# Altium PCB PCB4.PcbDoc (part 2 of 3)
Units mm, origin at the board's own origin, x right, y up, seen from the top; angles counter-clockwise.
Board outline 75.87 x 93.52 mm, 2 copper layers (Top Layer, Bottom Layer); 206 components, 153 nets, 707 pads, 254 vias.
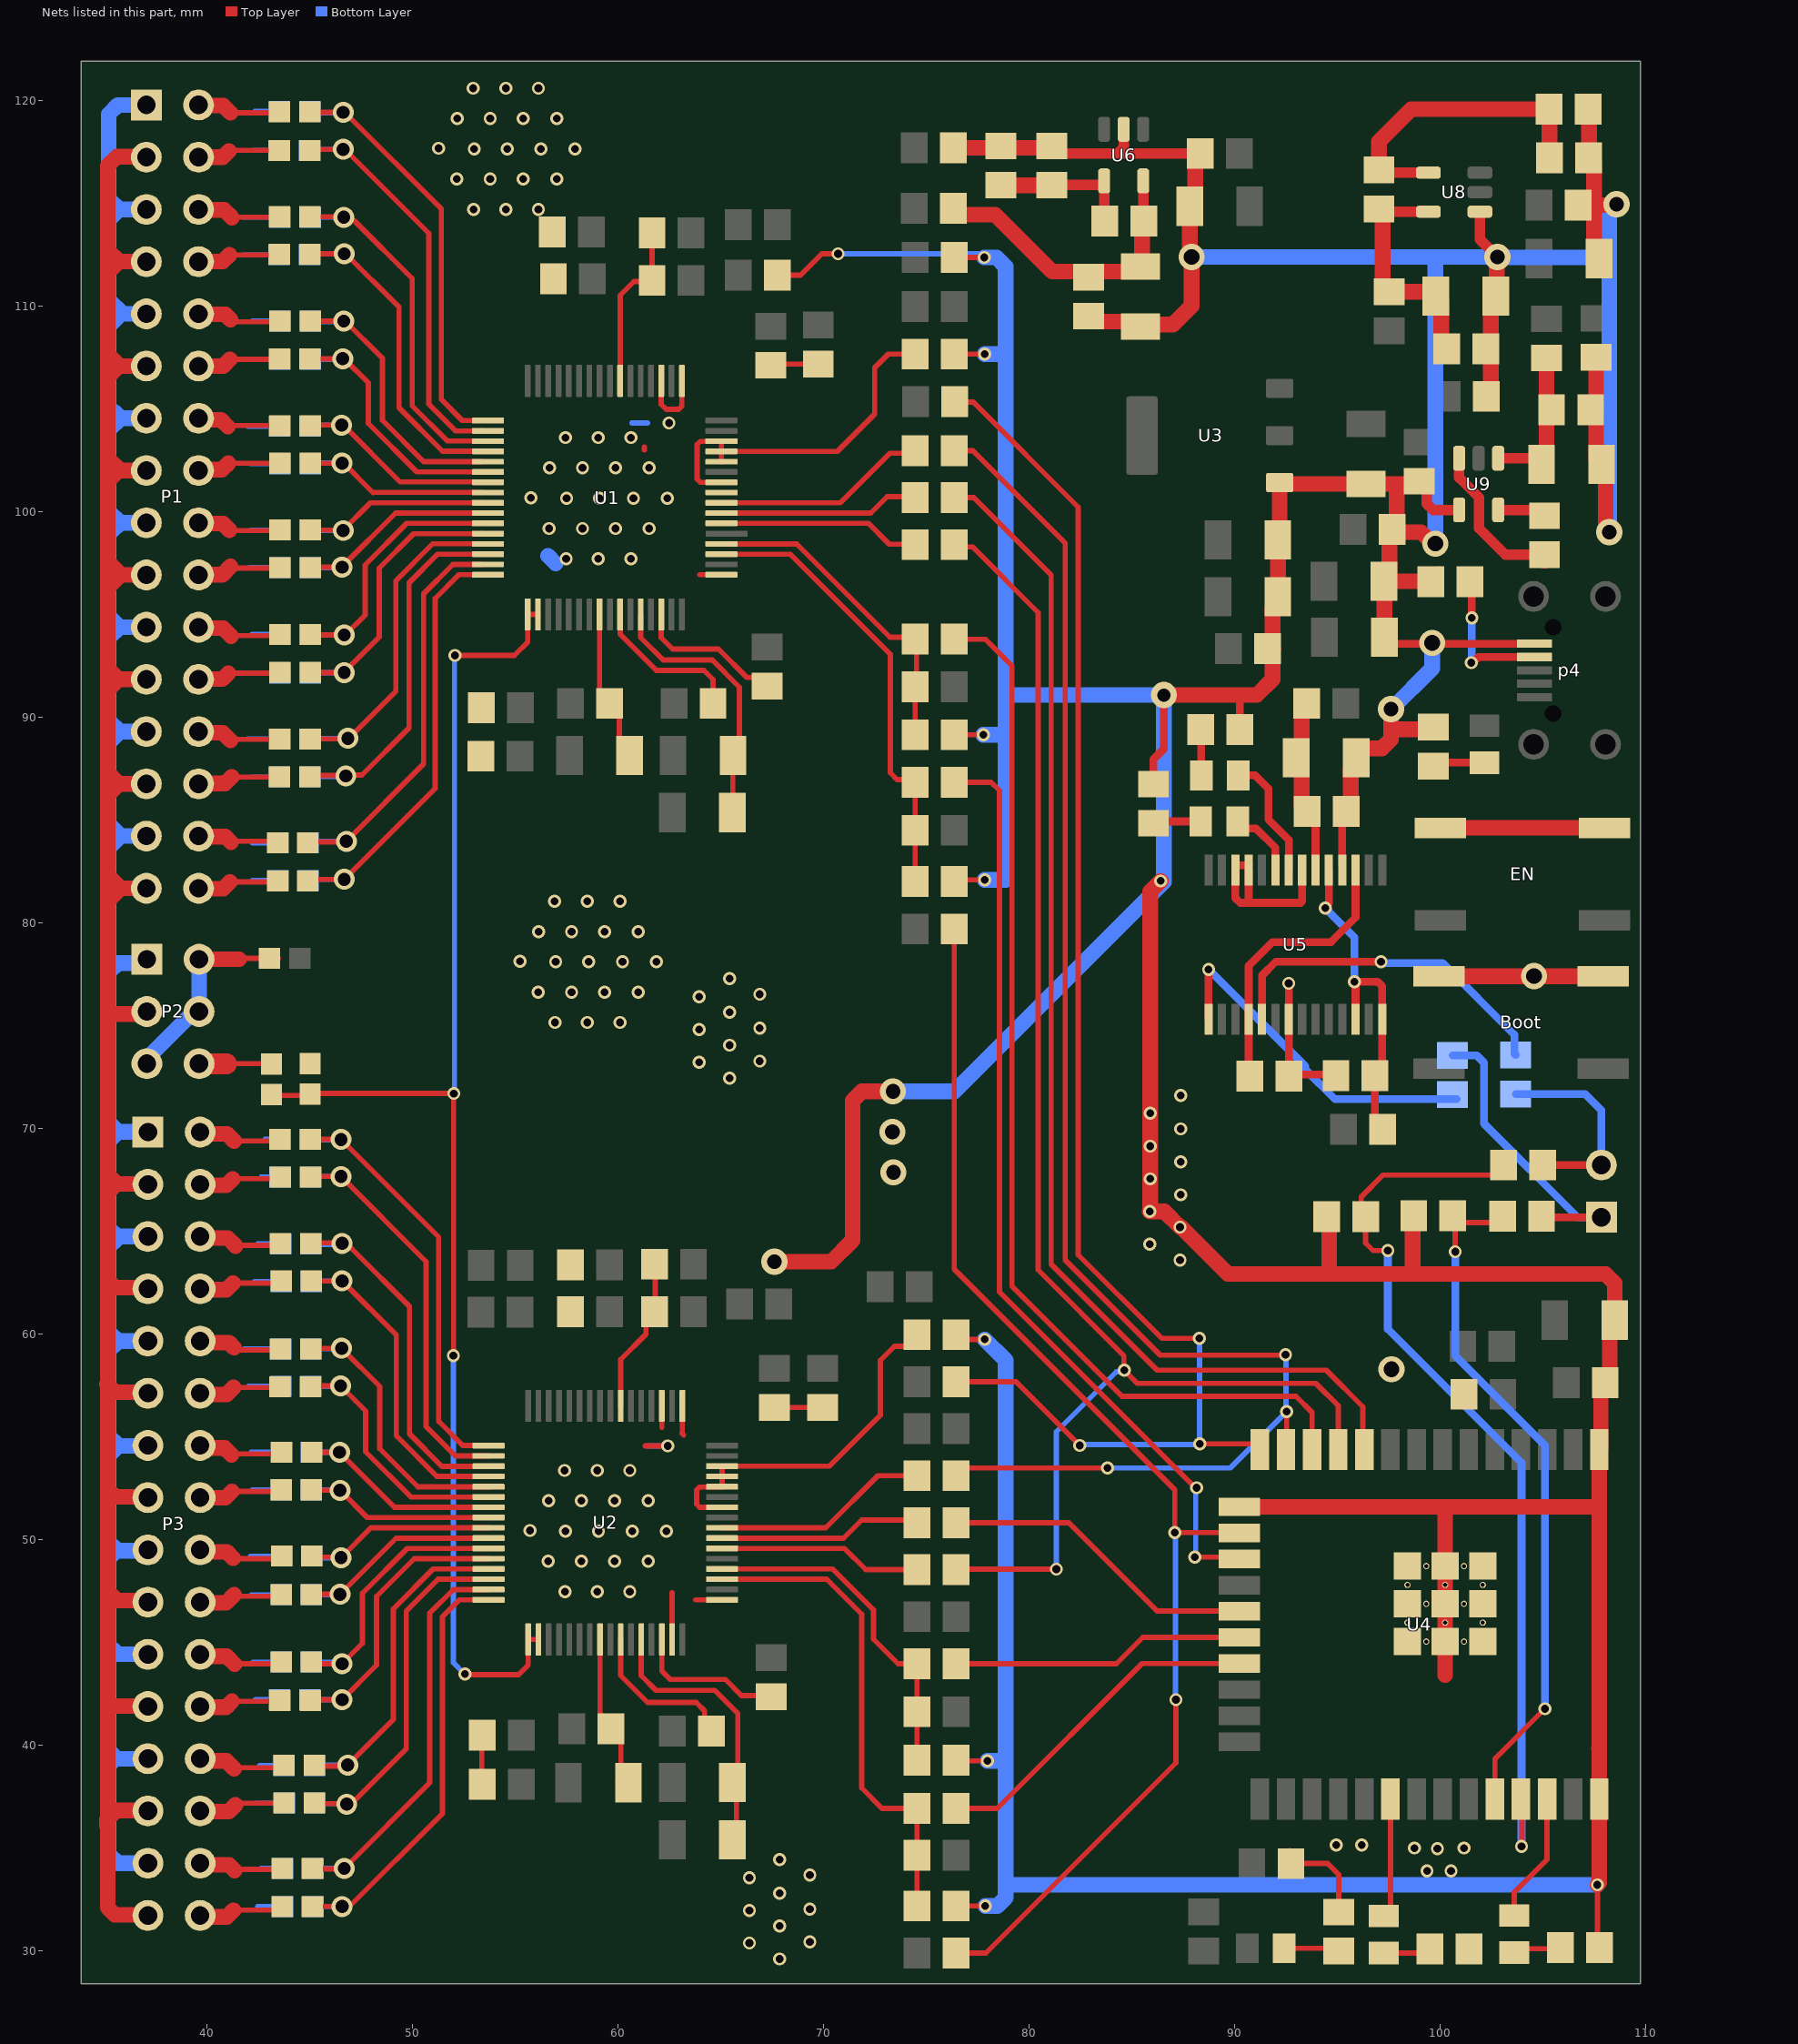
[diagram p2: the nets of this part, all layers, seen from the top]

## Via types
v1: diameter 0.635, hole 0.381, Top Layer to Bottom Layer, 194 vias
v2: diameter 1.016, hole 0.635, Top Layer to Bottom Layer, 33 vias
v3: diameter 1.27, hole 0.711, Top Layer to Bottom Layer, 17 vias
v4: diameter 1.27, hole 0.762, Top Layer to Bottom Layer, 8 vias
v5: diameter 1.27, hole 0.635, Top Layer to Bottom Layer, 2 vias

## Nets (pads, with @x,y where several pads share a name; then routed paths per layer and width w, separated by ;. In a path a pad name is that pad's centre, name@x,y a point inside that pad or via, vN(x,y) a via of type N, cw(c..) or ccw(c..) an arc to the next point about the centre after c; other vN are vias at no path point) (continued)
GND: Boot.1 Boot.3 C1.2 C3.2 C4.2 C5.2 C6.2 C7.2 C8.2 C11.2 C12.2 C26.2 C28.2 C29.2 C30.2 C31.2 C32.2 C33.2 C34.2 C35.2 C36.1 C37.2 C38.2 C39.1 C40.1 C41.2 C42.1 C43.1 C44.2 C45.2 C46.1 C47.1 C48.1 C49.2 C50.2 C51.1 C52.2 C53.2 C54.1 C55.1 C56.2 C57.1 C58.1 C59.2 C60.2 C61.2 C62.1 C63.2 C65.1 C66.2 C67.1 C68.2 C69.2 C70.2 C71.1 C72.1 C73.2 C74.1 C75.1 C76.2 C77.2 C78.1 C79.2 C80.1 C81.2 C82.1 C83.1 C84.2 C85.2 C86.1 C87.2 C88.1 C89.1 C90.2 C91.2 C92.2 C93.1 C94.1 C95.1 C96.2 C97.1 C98.1 C99.1 C100.1 EN.1 EN.3 p4.G R36.1 R48.2 R50.2 R63.2 R66.1 R68.1 R70.2 R71.1 R73.1 R75.2 R76.1 R77.1 R78.1 U1.33 U1.41 U1.49 U1.51 U2.31 U2.33 U2.49 U2.51 U3.1 U4.1 U4.15 U4.38 U4.39_1 U4.39_2 U4.39_3 U4.39_4 U4.39_5 U4.39_6 U4.39_7 U4.39_8 U4.39_9 U4.39_10 U4.39_11 U4.39_12 U4.39_13 U4.39_14 U4.39_15 U4.39_16 U4.39_17 U4.39_18 U4.39_19 U4.39_20 U4.39_21 U5.7 U5.18 U5.21 U5.25 U5.26 U6.2 U8.1 U9.4 | length 539.4
  Top Layer w0.254: C4.2@53.33,90.729 C4.2@53.355,90.703 ; C5.2@53.373,38.711 C6.2@53.373,40.11 ; C6.2@53.373,40.237 53.619,40.484 C6.2@53.619,40.589 ; C6.2@53.398,40.466 C6.2@53.619,40.687 ; 61.29,102.972 61.29,103.124 ; 61.316,54.534 v1(62.433,54.534) ; U1.51@62.11,106.34 62.11,105.2 62.357,104.953 62.958,104.953 63.107,105.102 63.107,106.337 U1.49@63.11,106.34 ; 62.135,55.445 U2.51@62.135,56.48 ; U2.31@62.635,45.12 62.635,47.398 ; 63.119,55.143 63.195,55.067 ; 63.135,55.16 U2.49@63.135,56.48 ; 63.789,47.05 U2.33@65.065,47.05 ; 63.989,96.91 U1.33@65.04,96.91 ; C26.2@66.995,107.544 C26.2@67.437,107.102 67.488,107.152 C29.2@69.748,107.152 ; C28.2@67.538,56.48 C28.2@67.615,56.403 C30.2@69.952,56.403 ; R36.1@67.752,111.481 68.885,111.481 69.926,112.522 v1(70.714,112.522) ; C32.2@76.363,89.129 v1(77.775,89.129) ; R48.2@76.363,107.645 v1(77.851,107.645) ; R50.2@76.363,112.344 v1(77.826,112.344) ; C33.2@76.454,32.156 v1(77.876,32.156) ; C34.2@76.454,39.243 76.479,39.218 v1(77.978,39.218) ; R63.2@76.454,59.944 76.683,59.715 v1(77.851,59.715) ; C31.2@76.759,82.017 76.81,82.067 v1(77.851,82.067) ; C36.1@92.113,95.834 C36.1@92.367,96.088 ; C39.1@92.695,34.849 92.695,34.749 93.218,34.226 94.527,34.226 95.072,33.68 R71.1@95.072,31.862 ; C55.1@100.802,57.404 C55.1@101.158,57.048 ; C55.1@101.358,57.204 C55.1@101.514,57.048 ; R73.1@101.407,30.059 R73.1@101.422,30.074 ; v1(107.655,33.188) 107.655,30.24 R76.1@107.76,30.135
  Top Layer w0.381: R68.1@86.055,86.726 86.055,87.935 86.563,88.443 v5(86.563,91.059) ; U5.26@90.039,82.543 90.039,81.182 90.272,80.95 90.678,80.95 ; U5.26@90.04,82.779 U5.25@90.69,82.779 ; R78.1@90.256,89.383 90.256,90.79 90.526,91.059 ; U5.25@90.689,82.543 90.689,80.961 90.678,80.95 ; v1(92.634,77.038) 92.639,77.033 U5.7@92.639,75.293 92.639,72.614 92.619,72.593 94.884,72.593 C43.1@94.935,72.542 ; U5.21@93.289,82.543 93.289,81.021 93.218,80.95 90.678,80.95 ; U5.18@95.24,82.779 95.24,85.196 C97.1@95.438,85.395 ; C54.1@97.294,93.878 97.613,93.56 p4.G@104.602,93.56 ; R77.1@99.187,96.799 99.416,97.028 99.879,97.028 R77.1@99.981,97.13
  Top Layer w0.508: C38.2@81.102,117.765 81.468,117.399 84.316,117.399 ; U6.2@84.607,118.578 84.613,118.572 84.613,117.696 84.316,117.399 ; C49.2@88.255,117.399 84.316,117.399 ; C50.2@98.984,101.463 99.351,101.095 99.351,100.369 99.655,100.066 U9.4@100.929,100.066 ; U8.1@101.982,114.528 U8.1@101.941,114.569 101.941,113.223 v3(102.794,112.37)
  Top Layer w0.737: 107.747,39.192 107.747,39.776 107.747,51.41 U4.1@107.747,54.356 107.829,54.438 107.829,57.223 108.113,57.507 C62.1@108.113,57.607
  Top Layer w0.762: v3(67.615,63.5) 70.383,63.5 71.425,64.541 71.425,71.334 71.871,71.78 v3(73.381,71.78) ; C37.2@76.312,117.678 81.016,117.678 C38.2@81.102,117.765 ; C41.2@82.906,109.489 83.173,109.222 85.177,109.222 C40.1@85.42,108.979 85.523,109.082 87.01,109.082 87.909,109.982 v4(87.909,112.37) ; v1(85.877,65.938) 86.589,65.938 v1(87.351,65.176) ; v1@85.903,65.964 v1(85.903,67.526) v1(85.903,69.113) ; v1@85.903,69.164 85.903,81.509 v1(86.411,82.017) ; v5(86.563,91.059) 90.526,91.059 91.084,91.059 91.846,91.821 C35.2@91.846,93.319 ; v1@87.376,65.202 89.68,62.898 94.666,62.898 ; C48.1@87.745,114.833 88.085,115.174 88.085,115.852 88.087,115.854 88.087,117.231 C49.2@88.255,117.399 ; v4@87.821,112.458 C48.1@87.821,114.833 ; U4.15@90.237,51.571 100.279,51.571 ; C35.2@91.603,93.32 C35.2@91.846,93.563 ; C35.2@91.872,93.294 C35.2@91.846,93.319 ; C42.1@92.05,98.666 C42.1@92.113,98.603 ; C100.1@94.605,65.38 94.605,62.959 94.666,62.898 ; C97.1@95.489,85.395 95.656,85.562 95.656,87.435 95.923,87.701 C44.2@95.923,88.011 95.923,88.196 96.187,88.46 97.166,88.46 97.612,88.907 97.612,89.391 ; C47.1@96.393,101.334 92.253,101.334 U3.1@92.194,101.393 92.194,98.684 C42.1@92.113,98.603 ; C47.1@96.703,101.334 97.892,101.334 ; C46.1@97.269,96.596 97.533,96.86 97.533,98.813 C45.2@97.587,98.867 ; C54.1@97.294,93.878 C54.1@97.294,94.188 ; C54.1@97.558,94.452 C54.1@97.294,94.188 ; v3(97.612,90.373) 97.612,89.391 ; C99.1@98.669,65.303 98.669,62.961 98.732,62.898 ; C50.2@98.984,101.463 98.855,101.334 97.892,101.334 ; R77.1@99.558,96.571 99.532,96.596 97.294,96.596 C54.1@97.294,94.188 ; R66.1@99.67,89.494 99.566,89.391 97.612,89.391 ; v4(99.771,98.425) 99.634,98.425 99.075,98.984 97.8,98.984 C45.2@97.673,99.111 97.892,99.329 97.892,101.334 ; Boot.1@99.944,77.383 Boot.3@107.929,77.383 108.219,77.383 Boot.3@108.229,77.394 ; EN.1@100.021,84.597 EN.3@108.005,84.597 ; 100.247,43.39 U4.39_6@100.247,45.021 U4.39_16@100.247,45.938 U4.39_5@100.247,46.856 U4.39_15@100.247,47.773 U4.39_4@100.247,48.691 100.247,51.539 100.279,51.571 ; C53.2@102.255,105.588 102.474,105.806 102.474,110.224 C51.1@102.715,110.465 C51.1@102.754,110.504 ; v3(102.794,112.37) 102.754,112.33 C51.1@102.754,110.504 ; C51.1@102.918,110.668 C51.1@102.754,110.504 ; C56.2@106.716,114.884 C56.2@107.249,114.884 ; C59.2@107.198,119.558 107.249,119.507 R75.2@107.249,117.196 ; R75.2@107.224,117.196 107.493,116.927 107.493,116.38 107.493,114.884 ; C63.2@107.635,107.442 C63.2@107.594,107.483 107.594,105.743 107.594,105.196 C60.2@107.325,104.927 107.594,104.658 107.594,104.112 107.594,103.53 107.597,103.528 107.597,102.55 C58.1@107.861,102.286 108.052,102.095 108.052,99.299 108.229,99.121 v3(108.229,98.984) ; v1(107.655,33.188) 107.747,33.279 U4.38@107.747,37.356 107.747,39.192 ; 107.721,39.802 107.747,39.776 ; 107.747,51.41 107.585,51.571 100.279,51.571 ; C57.1@107.81,112.293 107.493,112.61 107.493,114.54 107.249,114.784 C56.2@107.249,114.884 ; R76.1@107.938,30.059 R76.1@107.938,30.339 ; C62.1@108.036,57.607 108.255,57.826 108.255,59.673 ; C61.2@108.496,60.655 108.496,62.451 108.049,62.898 98.732,62.898 ; v3(108.585,114.935) 108.534,114.884 107.493,114.884 ; C61.2@108.648,60.066 C61.2@108.648,60.249 ; C35.2@91.846,93.319 C35.2@91.846,93.563 ; C35.2@91.846,93.563 91.846,95.258 92.113,95.524 C36.1@92.113,95.834 C42.1@92.113,98.603 ; 94.666,62.898 98.732,62.898 ; C56.2@107.249,114.884 107.493,114.884
  Bottom Layer w0.254: 41.783,112.471 C93.1@43.512,112.471 ; 41.783,114.3 C85.2@43.563,114.3 ; 41.834,59.258 C76.2@43.588,59.258 ; 41.986,88.925 C90.2@43.537,88.925 ; 42.012,104.14 C91.2@43.537,104.14 ; 42.037,57.429 C75.1@43.588,57.429 ; 42.088,97.257 C80.1@43.563,97.257 ; 42.113,49.174 C69.2@43.639,49.174 ; 42.139,99.085 C81.2@43.563,99.085 ; 42.139,102.311 C82.1@43.563,102.311 ; 42.164,47.295 C71.1@43.613,47.295 ; 42.164,54.229 C73.2@43.613,54.229 ; 42.189,94.005 C79.2@43.563,94.005 ; 42.215,52.4 C72.1@43.613,52.4 C72.1@43.461,52.553 ; 42.215,82.042 C95.1@43.461,82.042 ; 42.215,83.871 C96.2@43.461,83.871 ; 42.215,87.071 C89.1@43.537,87.071 ; 42.215,109.245 C84.2@43.563,109.245 ; 42.24,44.018 C70.2@43.615,44.018 ; 42.291,107.391 C83.1@43.563,107.391 ; 42.291,117.551 C94.1@43.512,117.551 ; 42.316,62.535 C74.1@43.612,62.535 ; 42.342,119.456 C92.2@43.537,119.456 C92.2@43.436,119.355 ; 42.367,42.189 C88.1@43.537,42.189 ; 42.418,37.16 C65.1@43.766,37.16 ; 42.418,92.126 C78.1@43.563,92.126 ; 42.469,32.131 C67.1@43.69,32.131 ; 42.469,64.364 C77.2@43.588,64.364 ; 42.57,38.989 C66.2@43.763,38.989 ; 42.647,33.985 C68.2@43.69,33.985 ; 42.647,67.615 C86.1@43.561,67.615 ; 42.824,69.444 C87.2@43.561,69.444 ; 60.681,104.292 61.443,104.292 ; 61.417,54.534 v1(62.433,54.534) ; v1(70.714,112.522) 77.545,112.522 77.672,112.395 v1@77.775,112.395
  Bottom Layer w0.762: 56.595,97.837 56.972,97.46 ; v3(73.381,71.78) 76.378,71.78 86.563,81.966 v5(86.563,91.059) 78.867,91.059 ; v1(77.775,89.129) 78.689,89.129 78.867,88.951 ; v1(77.826,112.344) 78.421,112.344 78.867,111.898 78.867,107.544 ; v1(77.851,59.715) 78.867,58.699 78.867,39.218 ; v1(77.851,82.067) 78.867,82.067 78.867,88.951 ; v1(77.851,107.645) 78.765,107.645 78.867,107.544 ; v1(77.876,32.156) 78.461,32.156 78.867,32.563 78.867,33.188 ; v1(77.978,39.218) 78.867,39.218 ; v4(87.909,112.37) 99.771,112.37 ; v3(97.612,90.373) 97.633,90.373 99.619,92.359 v4(99.619,93.599) ; v4(99.771,98.425) 99.771,112.37 ; v1(107.655,33.188) 78.867,33.188 ; v3@108.092,98.984 v3(108.229,98.984) 108.229,112.203 ; v3(108.585,114.935) 108.585,114.798 108.229,114.442 108.229,112.203 ; 78.867,33.188 78.867,39.218 ; 78.867,88.951 78.867,91.059 ; 78.867,91.059 78.867,107.544 ; 99.771,112.37 v3(102.794,112.37) 102.819,112.344 108.088,112.344 108.229,112.203
  other v1: 67.869,29.578 66.396,30.353 69.342,30.404 67.869,31.178 66.396,31.941 69.342,32.004 67.869,32.785 66.396,33.528 69.342,33.655 99.365,33.858 100.533,33.858 67.869,34.417 99.873,34.95 98.755,34.976 101.168,34.976 94.945,35.128 96.19,35.128 57.429,47.447 58.991,47.447 60.579,47.447 56.604,48.92 58.229,48.92 59.836,48.92 61.468,48.92 57.455,50.394 59.055,50.394 60.706,50.394 62.357,50.394 55.715,50.419 56.629,51.867 58.229,51.867 59.836,51.867 61.468,51.867 57.404,53.34 58.991,53.34 60.579,53.34 87.351,63.576 85.877,64.351 87.376,66.751 87.376,68.351 87.376,69.958 85.903,70.714 87.376,71.59 65.43,72.428 63.957,73.203 66.904,73.254 65.43,74.028 63.957,74.79 66.904,74.854 56.947,75.133 58.509,75.133 60.096,75.133 65.43,75.635 63.957,76.378 66.904,76.505 56.121,76.606 57.747,76.606 59.353,76.606 60.985,76.606 65.43,77.267 56.972,78.08 58.572,78.08 60.223,78.08 61.874,78.08 55.232,78.105 56.147,79.553 57.747,79.553 59.353,79.553 60.985,79.553 56.921,81.026 58.509,81.026 60.096,81.026 57.48,97.688 59.042,97.688 60.63,97.688 56.655,99.162 58.28,99.162 59.887,99.162 61.519,99.162 57.506,100.635 59.106,100.635 60.757,100.635 62.408,100.635 55.766,100.66 56.68,102.108 58.28,102.108 59.887,102.108 61.519,102.108 57.455,103.581 59.042,103.581 60.63,103.581 62.484,104.292 52.984,114.681 54.546,114.681 56.134,114.681 52.159,116.154 53.785,116.154 55.391,116.154 57.023,116.154 53.01,117.627 54.61,117.627 56.261,117.627 57.912,117.627 51.27,117.653 52.184,119.101 53.785,119.101 55.391,119.101 57.023,119.101 52.959,120.574 54.546,120.574 56.134,120.574
  other v3: 73.406,67.843 73.355,69.812
  other v4: 97.638,58.268 104.572,77.394
GPIO: R63.1 U2.42 U2.44 U2.45 U2.46 | length 18.7
  Top Layer w0.254: U2.44@65.052,52.537 63.979,52.537 63.83,52.388 63.83,51.699 63.979,51.55 U2.42@65.065,51.55 ; U2.44@65.065,52.55 U2.45@65.065,53.05 U2.46@65.065,53.55 70.289,53.55 72.771,56.032 72.771,58.699 73.455,59.383 74.031,59.383 74.554,59.906 R63.1@74.554,59.944 ; R63.1@74.5,59.422 R63.1@75.021,59.944
GPIO0: R48.1 U1.42 U1.44 U1.45 U1.46 | length 17.9
  Top Layer w0.254: U1.42@65.04,101.41 64.004,101.41 63.856,101.559 63.856,103.248 64.004,103.397 65.027,103.397 U1.46@65.04,103.41 U1.45@65.04,102.91 ; U1.44@65.04,102.41 U1.45@65.04,102.91 ; R48.1@74.463,107.645 73.152,107.645 72.492,106.985 72.492,104.724 70.678,102.91 U1.45@65.04,102.91
IN1N: C68.1 R32.1 U2.15 | length 20.6
  Top Layer w0.254: R32.1@45.134,33.909 R32.1@45.16,33.934 ; R32.1@45.134,33.96 46.658,33.96 50.849,38.151 50.849,46.404 51.995,47.55 U2.15@53.705,47.55
  Bottom Layer w0.254: C68.1@45.16,33.985 v2(46.684,33.985)
IN1N_: C96.1 R4.1 U1.15 | length 20.1
  Top Layer w0.254: R4.1@45.237,83.922 46.761,83.922 50.546,87.706 50.546,95.987 51.97,97.41 53.359,97.41 U1.15@53.365,97.417
  Bottom Layer w0.254: C96.1@45.263,83.947 v2(46.787,83.947)
IN1P: C67.2 R31.1 U2.16 | length 21.8
  Top Layer w0.254: R31.1@45.134,32.08 45.185,32.131 v2@46.788,32.131 ; v2@46.863,32.056 51.459,36.652 51.459,46.226 52.282,47.05 U2.16@53.705,47.05
  Bottom Layer w0.254: C67.2@45.16,32.131 v2(46.582,32.131)
IN1P_: C95.2 R3.1 U1.16 | length 21.1
  Top Layer w0.254: R3.1@45.288,82.093 v2(46.685,82.093) 51.105,86.512 51.105,95.758 52.257,96.91 53.359,96.91 U1.16@53.365,96.917
  Bottom Layer w0.254: C95.2@45.263,82.093 v2(46.685,82.093)
IN2N: C66.1 R34.1 U2.13 | length 17.5
  Top Layer w0.254: R34.1@45.109,38.964 46.734,38.964 v2@46.76,38.989 ; v2@46.43,39.065 v2@46.618,39.254 ; v2(46.858,39.014) 49.071,41.227 49.071,46.607 51.014,48.55 U2.13@53.705,48.55
  Bottom Layer w0.254: C66.1@45.233,38.989 45.258,39.014 v2(46.858,39.014)
IN2N_: C90.1 R14.1 U1.13 | length 16.7
  Top Layer w0.254: R14.1@45.212,88.925 46.838,88.925 v2@46.882,88.97 ; v2@46.985,89.027 49.198,91.24 49.198,96.62 51.001,98.423 53.359,98.423 U1.13@53.365,98.417
  Bottom Layer w0.254: C90.1@45.263,88.951 v2(46.863,88.951)
IN2P: C65.2 R33.1 U2.14 | length 18.5
  Top Layer w0.254: R33.1@45.256,37.135 46.782,37.135 v2(46.807,37.109) 47.014,37.109 47.284,37.38 47.286,37.38 49.708,39.802 49.708,46.507 51.257,48.057 53.698,48.057 U2.14@53.705,48.05
  Bottom Layer w0.254: C65.2@45.134,37.135 46.658,37.135 v2@46.684,37.109
IN2P_: C89.2 R10.1 U1.14 | length 18.6
  Top Layer w0.254: R10.1@45.212,87.147 v2@46.738,87.147 ; v2(46.763,87.122) v2@46.788,87.147 ; v2@46.787,87.071 v2@46.863,87.147 ; v2@46.787,87.147 v2@46.788,87.147 ; v2@46.877,87.161 v2@46.863,87.147 ; v2@46.915,87.122 46.89,87.147 v2@46.863,87.147 ; U1.14@53.365,97.917 53.359,97.91 51.225,97.91 49.835,96.52 49.835,89.459 47.549,87.173 46.814,87.173 v2@46.788,87.147 ; v2@46.788,87.147 v2@46.863,87.147
  Bottom Layer w0.254: C89.2@45.237,87.097 46.761,87.097 v2@46.787,87.071
IN3N: C70.1 R25.1 U2.11 | length 13.9
  Top Layer w0.254: R25.1@45.082,43.967 45.056,43.942 v2(46.58,43.942) 47.574,44.936 47.574,47.371 49.753,49.55 U2.11@53.705,49.55
  Bottom Layer w0.254: C70.1@45.085,44.018 v2@46.582,44.018
IN3N_: C79.1 R16.1 U1.11 | length 13.4
  Top Layer w0.254: R16.1@45.161,93.98 v2(46.685,93.98) ; v2@46.707,93.955 47.701,94.948 47.701,97.384 49.728,99.41 53.359,99.41 U1.11@53.365,99.417
  Bottom Layer w0.254: C79.1@45.188,93.98 v2(46.685,93.98)
IN3P: C88.2 R11.1 U2.12 | length 15.1
  Top Layer w0.254: R11.1@45.033,42.189 v2(46.582,42.189) 48.26,43.867 48.26,47.219 50.089,49.047 53.703,49.047 U2.12@53.705,49.05
  Bottom Layer w0.254: C88.2@45.007,42.189 v2(46.582,42.189)
IN3P_: C78.2 R15.1 U1.12 | length 14.5
  Top Layer w0.254: R15.1@45.136,92.151 v2(46.685,92.151) ; v2@46.709,92.202 48.387,93.88 48.387,97.231 50.063,98.908 53.356,98.908 U1.12@53.365,98.917
  Bottom Layer w0.254: C78.2@45.11,92.151 v2(46.685,92.151)
IN4N: C69.1 R29.1 U2.9 | length 10.7
  Top Layer w0.254: R29.1@45.107,49.124 46.506,49.124 v2(46.531,49.098) 47.983,50.55 U2.9@53.705,50.55
  Bottom Layer w0.254: C69.1@45.109,49.174 45.185,49.098 v2(46.531,49.098)
IN4N_: C81.1 R18.1 U1.9 | length 10
  Top Layer w0.254: R18.1@45.21,99.085 46.609,99.085 v2(46.634,99.06) ; v2@46.658,99.111 47.958,100.41 53.359,100.41 U1.9@53.365,100.417
  Bottom Layer w0.254: C81.1@45.288,99.06 v2(46.634,99.06)
IN4P: C71.2 R27.1 U2.10 | length 11
  Top Layer w0.254: R27.1@45.109,47.295 45.134,47.32 v2@46.303,47.32 ; v2(46.48,47.32) 49.21,50.05 U2.10@53.705,50.05
  Bottom Layer w0.254: C71.2@45.083,47.295 46.455,47.295 v2(46.48,47.32)
IN4P_: C80.2 R17.1 U1.10 | length 10.6
  Top Layer w0.254: R17.1@45.237,97.282 v2@46.607,97.282 ; v2@46.607,97.333 49.185,99.91 53.359,99.91 U1.10@53.365,99.917
  Bottom Layer w0.254: C80.2@45.187,97.257 46.558,97.257 v2(46.584,97.282)
IN5N: C73.1 R30.1 U2.7 | length 11.1
  Top Layer w0.254: R30.1@45.083,54.229 v2(46.455,54.229) 49.134,51.55 U2.7@53.705,51.55
  Bottom Layer w0.254: C73.1@45.083,54.229 v2(46.455,54.229)
IN5N_: C91.1 R20.1 U1.7 | length 10.7
  Top Layer w0.254: R20.1@45.187,104.191 v2(46.558,104.191) ; v2@46.582,104.242 49.401,101.422 53.36,101.422 U1.7@53.365,101.417
  Bottom Layer w0.254: C91.1@45.187,104.191 v2(46.558,104.191)
IN5P: C72.2 R28.1 U2.8 | length 10.6
  Top Layer w0.254: R28.1@45.082,52.4 45.109,52.375 v2(46.48,52.375) 47.801,51.054 53.701,51.054 U2.8@53.705,51.05
  Bottom Layer w0.254: C72.2@45.083,52.4 46.455,52.4 v2(46.48,52.375)
IN5P_: C82.2 R19.1 U1.8 | length 10.2
  Top Layer w0.254: R19.1@45.212,102.337 v2(46.584,102.337) ; v2@46.607,102.387 48.085,100.91 48.091,100.917 U1.8@53.365,100.917
  Bottom Layer w0.254: C82.2@45.187,102.362 46.558,102.362 v2(46.584,102.337)
IN6N: C76.1 R22.1 U2.5 | length 14.7
  Top Layer w0.254: R22.1@45.056,59.284 v2(46.557,59.284) 48.412,57.428 48.412,54.407 50.269,52.55 U2.5@53.705,52.55
  Bottom Layer w0.254: C76.1@45.058,59.258 46.531,59.258 v2(46.557,59.284)
IN6N_: C84.1 R21.1 U1.5 | length 14.3
  Top Layer w0.254: R21.1@45.16,109.245 v2(46.66,109.245) ; v2@46.684,109.296 48.539,107.44 48.539,104.419 50.549,102.41 53.359,102.41 U1.5@53.365,102.417
  Bottom Layer w0.254: C84.1@45.161,109.22 46.634,109.22 v2(46.66,109.245)
IN6P: C75.2 R12.1 U2.6 | length 13.5
  Top Layer w0.254: R12.1@45.056,57.455 v2(46.506,57.455) 47.727,56.234 47.727,54.254 49.936,52.045 53.7,52.045 U2.6@53.705,52.05
  Bottom Layer w0.254: C75.2@45.058,57.429 46.48,57.429 v2(46.506,57.455)
IN6P_: C83.2 R5.1 U1.6 | length 13.1
  Top Layer w0.254: R5.1@45.16,107.417 v2(46.609,107.417) ; v2@46.633,107.467 47.854,106.247 47.854,104.267 50.21,101.91 50.217,101.917 U1.6@53.365,101.917
  Bottom Layer w0.254: C83.2@45.161,107.391 46.584,107.391 v2(46.609,107.417)
IN7N: C77.1 R23.1 U2.3 | length 18.3
  Top Layer w0.254: R23.1@45.083,64.414 46.763,64.414 47.06,64.117 49.86,61.317 49.86,55.118 51.435,53.543 53.698,53.543 U2.3@53.705,53.55
  Bottom Layer w0.254: C77.1@45.058,64.364 45.083,64.338 v2@46.557,64.338
  other v2: 46.582,64.389
IN7N_: C85.1 R7.1 U1.3 | length 17.3
  Top Layer w0.254: R7.1@45.161,114.325 46.634,114.325 v2(46.66,114.3) v2@46.704,114.256 ; 47.187,114.13 49.987,111.33 49.987,105.131 51.701,103.416 U1.3@53.365,103.416
  Bottom Layer w0.254: C85.1@45.187,114.3 v2(46.66,114.3)
IN7P: C74.2 R26.1 U2.4 | length 17
  Top Layer w0.254: R26.1@45.056,62.535 45.082,62.56 v2(46.582,62.56) 49.224,59.919 49.224,55.018 51.192,53.05 U2.4@53.705,53.05
  Bottom Layer w0.254: C74.2@45.082,62.535 45.107,62.56 v2(46.582,62.56)
IN7P_: C93.2 R6.1 U1.4 | length 16.5
  Top Layer w0.254: R6.1@45.185,112.522 v2(46.685,112.522) ; v2@46.709,112.573 49.351,109.931 49.351,105.031 51.464,102.917 U1.4@53.365,102.917
  Bottom Layer w0.254: C93.2@45.21,112.522 v2(46.685,112.522)
IN8N: C87.1 R13.1 U2.1 | length 21.6
  Top Layer w0.254: R13.1@45.058,69.444 v2(46.531,69.444) 51.281,64.694 51.281,55.729 52.451,54.559 53.696,54.559 U2.1@53.705,54.55
  Bottom Layer w0.254: C87.1@45.058,69.418 46.506,69.418 v2(46.531,69.444)
IN8N_: C92.1 R9.1 U1.1 | length 21.5
  Top Layer w0.254: R9.1@45.161,119.405 v2@46.841,119.405 ; v2@46.658,119.456 46.775,119.34 51.408,114.706 51.408,105.437 52.428,104.417 U1.1@53.365,104.417
  Bottom Layer w0.254: C92.1@45.161,119.38 46.609,119.38 v2(46.634,119.405)
IN8P: C86.2 R24.1 U2.2 | length 20.5
  Top Layer w0.254: R24.1@45.056,67.615 45.083,67.64 v2(46.531,67.64) 50.671,63.5 50.671,55.475 52.095,54.051 53.704,54.051 U2.2@53.705,54.05
  Bottom Layer w0.254: C86.2@45.083,67.589 45.134,67.64 v2(46.531,67.64)
IN8P_: C94.2 R8.1 U1.2 | length 20.1
  Top Layer w0.254: R8.1@45.187,117.602 v2(46.634,117.602) v2@46.638,117.606 ; v2@46.658,117.653 50.798,113.513 50.798,105.208 52.097,103.91 53.359,103.91 U1.2@53.365,103.917
  Bottom Layer w0.254: C94.2@45.237,117.602 v2(46.634,117.602)
LED2: D3.A U4.36 | length 6.3
  Top Layer w0.254: D3.A@103.61,31.696 103.61,32.82 105.207,34.417 U4.36@105.207,37.356
LED3: D2.A U4.30 | length 5.8
  Top Layer w0.254: D2.A@97.257,31.67 97.587,32.001 U4.30@97.587,37.356
MISO: R51.2 R62.2 U4.14 | length 72.9
  Top Layer w0.254: R62.2@76.454,57.658 79.375,57.658 v1(82.474,54.559) ; R51.2@76.998,105.308 77.292,105.308 82.398,100.203 82.398,63.83 86.462,59.766 v1(88.29,59.766) ; v1(88.316,54.635) 90.914,54.635 91.059,54.49 U4.14@91.059,54.178
  Bottom Layer w0.254: v1(82.474,54.559) 82.512,54.597 88.278,54.597 v1(88.316,54.635) 88.303,54.648 88.303,59.753 v1(88.29,59.766)
MOSI: R40.2 R52.2 U4.16 | length 62.7
  Top Layer w0.254: R40.2@76.363,79.68 76.363,63.134 87.097,52.4 v1(87.097,50.317) 90.22,50.317 U4.16@90.237,50.301 ; R52.2@76.454,29.87 77.902,29.87 87.147,39.116 v1(87.147,42.189)
  Bottom Layer w0.254: v1(87.097,50.317) 87.122,50.292 87.122,42.215 v1(87.147,42.189)
NetC38_1: C38.1 R69.1 R70.1 U6.4 | length 6.7
  Top Layer w0.508: C38.1@81.102,115.865 83.5,115.865 U6.4@83.67,115.695 ; U6.4@83.657,116.068 83.67,116.055 83.67,115.865 83.67,114.135 R69.1@83.683,114.122
  Top Layer w0.762: R70.1@79.081,115.799 79.131,115.849 81.117,115.849 C38.1@81.102,115.865
NetC40_2: C40.2 C41.1 L1.1 R69.2 U6.5 | length 15
  Top Layer w0.508: U6.5@85.557,116.068 85.57,116.055 85.57,114.135 R69.2@85.583,114.122
  Top Layer w0.762: L1.1@76.312,114.732 76.312,114.696 76.581,114.427 78.359,114.427 81.128,111.658 C41.1@82.738,111.658 ; C41.1@82.738,111.557 C41.1@82.906,111.389 83.175,111.658 85.255,111.658 85.501,111.904 85.501,114.041 R69.2@85.583,114.122
NetC44_1: C44.1 C97.2 R65.1 U5.20 | length 8.8
  Top Layer w0.381: C97.2@93.538,85.395 93.939,84.994 U5.20@93.939,82.543
  Top Layer w0.762: C44.1@92.85,88.011 92.85,88.321 93.269,88.74 93.269,90.409 R65.1@93.513,90.653 ; C44.1@93.003,88.011 93.267,87.747 93.267,86.993 93.269,86.991 93.269,86.21 93.269,85.715 C97.2@93.589,85.395
NetC51_2: C51.2 C52.1 L2.1 R72.2 U8.5 | length 11.8
  Top Layer w0.508: R72.2@97.028,114.696 97.155,114.569 U8.5@99.431,114.569
  Top Layer w0.762: R72.2@97.028,114.696 97.206,114.518 97.206,110.893 L2.1@97.421,110.678 ; L2.1@97.521,110.678 99.581,110.678 C51.2@99.795,110.465 100.059,110.201 100.059,109.446 100.061,109.444 100.061,108.715 100.061,108.268 100.33,107.999 C52.1@100.33,107.899
NetC58_2: C58.2 C60.1 L3.1 U9.1 | length 8.1
  Top Layer w0.508: U9.1@102.829,102.576 104.651,102.576 C58.2@104.941,102.286 ; C58.2@104.675,102.02 C58.2@104.941,102.286 ; C58.2@105.181,102.527 C58.2@104.941,102.286 ; C60.1@105.181,104.684 C60.1@105.425,104.927 C60.1@105.181,105.171
  Top Layer w0.762: C58.2@105.181,102.527 C60.1@105.181,104.684 ; C60.1@105.181,105.171 L3.1@105.181,107.457
NetC59_1: C59.1 R72.1 R75.1 U8.4 | length 15.1
  Top Layer w0.508: R72.1@97.028,116.596 97.155,116.469 U8.4@99.431,116.469
  Top Layer w0.762: R72.1@97.028,116.596 97.028,117.983 98.603,119.558 C59.1@105.298,119.558 105.324,119.532 R75.1@105.324,117.196
NetC64_1: C64.1 U9.5 | length 2.4
  Top Layer w0.508: U9.5@102.829,100.066 104.694,100.066 C64.1@105.076,99.684
NetC64_2: C64.2 U9.3 | length 8.2
  Top Layer w0.508: U9.3@100.929,102.576 100.929,101.636 101.905,100.66 101.905,99.162 103.185,97.881 104.635,97.881 C64.2@105.08,97.881 ; C64.2@104.635,97.861 105.031,97.465 C64.2@105.131,97.465
NetC98_2: C98.2 U5.4 U5.17 | length 14.1
  Top Layer w0.381: C98.2@90.689,72.216 U5.4@90.689,75.293 90.689,77.887 91.846,79.045 94.691,79.045 95.889,80.243 U5.17@95.889,82.543
NetD1_C: D1.C R71.2 | length 2.2
  Top Layer w0.254: D1.C@92.238,30.099 R71.2@94.463,30.099 ; R71.2@95.01,29.75 R71.2@95.021,29.738
NetD2_C: D2.C R73.2 | length 2.1
  Top Layer w0.254: D2.C@97.104,29.87 R73.2@99.115,29.87 ; D2.C@97.206,29.82 D2.C@97.257,29.87
NetD3_C: D3.C R76.2 | length 2
  Top Layer w0.254: D3.C@103.356,30.074 R76.2@105.331,30.074
NetD4_C: D4.C R66.2 | length 2.3
  Top Layer w0.381: R66.2@99.974,87.935 100.138,87.771 D4.C@102.159,87.771
NetD5_C: D5.C R68.2 | length 2.3
  Top Layer w0.381: R68.2@86.055,84.826 86.142,84.912 D5.C@88.356,84.912
NetD6_C: D6.C R78.2 | length 2.2
  Top Layer w0.381: R78.2@88.356,89.383 88.381,89.358 D6.C@88.381,87.147
NetP1_1: P1.1 P1.5 P1.9 P1.13 P1.17 P1.21 P1.25 P1.29 P2.1 P3.1 P3.5 P3.9 P3.13 P3.17 P3.21 P3.25 P3.29 | length 132.4
  Bottom Layer w0.762: 35.277,49.124 35.59,49.436 ; P3.21@36.768,44.407 35.539,44.407 35.539,44.52 35.228,44.831 ; P3.25@36.781,39.314 35.552,39.314 ; P3.29@36.794,34.234 35.675,34.234 35.228,34.681 35.228,38.991 ; P3.13@36.794,54.541 35.711,54.541 ; P3.17@36.819,49.436 35.59,49.436 ; P1.29@37.059,84.201 35.814,84.201 ; P1.25@37.059,89.281 35.762,89.281 ; P1.21@37.059,94.361 35.762,94.361 ; P1.17@37.059,99.441 35.789,99.441 ; P1.13@37.059,104.521 35.814,104.521 ; P1.9@37.059,109.601 35.916,109.601 ; P1.5@37.059,114.681 35.738,114.681 ; P1.1@37.059,119.761 35.675,119.761 35.228,119.315 35.228,115.191 ; P2.1@37.084,78.207 36.901,78.024 35.675,78.024 35.228,77.577 ; P3.1@37.122,69.812 35.687,69.812 ; P3.9@37.135,59.639 35.675,59.639 ; P3.5@37.135,64.719 35.635,64.719 ; 35.228,38.991 35.552,39.314 ; 35.228,38.991 35.228,39.726 ; 35.228,39.726 35.228,44.831 ; 35.228,39.726 35.552,39.402 35.552,39.314 ; 35.228,44.831 35.228,49.86 ; 35.228,49.86 35.228,54.205 ; 35.228,49.86 35.59,49.499 35.59,49.436 ; 35.228,54.205 35.228,54.541 ; 35.228,54.205 35.375,54.205 35.711,54.541 ; 35.228,54.541 35.228,55.016 ; 35.228,54.541 35.703,54.541 ; 35.228,55.016 35.228,59.157 ; 35.228,55.016 35.703,54.541 ; 35.228,59.157 35.228,60.086 ; 35.228,59.157 35.675,59.603 35.675,59.639 ; 35.228,60.086 35.228,64.211 ; 35.228,60.086 35.675,59.639 ; 35.228,64.211 35.228,65.126 ; 35.228,64.211 35.635,64.618 35.635,64.719 ; 35.228,65.126 35.228,69.367 ; 35.228,65.126 35.635,64.719 ; 35.228,69.367 35.228,69.812 ; 35.228,69.367 35.242,69.367 35.687,69.812 ; 35.228,69.812 35.687,69.812 ; 35.228,69.812 35.228,70.271 ; 35.228,70.271 35.228,77.577 ; 35.228,70.271 35.687,69.812 ; 35.228,77.577 35.228,83.718 ; 35.228,83.718 35.228,84.252 ; 35.228,83.718 35.331,83.718 35.814,84.201 ; 35.228,84.252 35.228,84.787 ; 35.228,84.252 35.279,84.201 35.814,84.201 ; 35.228,84.787 35.228,88.798 ; 35.228,84.787 35.814,84.201 ; 35.228,88.798 35.228,89.256 ; 35.228,88.798 35.279,88.798 35.762,89.281 ; 35.228,89.256 35.228,89.814 ; 35.228,89.256 35.254,89.281 35.762,89.281 ; 35.228,89.814 35.228,93.828 ; 35.228,89.814 35.762,89.281 ; 35.228,93.828 35.228,94.386 ; 35.228,93.828 35.762,94.361 ; 35.228,94.386 35.228,94.894 ; 35.228,94.386 35.254,94.361 35.762,94.361 ; 35.228,94.894 35.228,98.984 ; 35.228,94.894 35.762,94.361 ; 35.228,98.984 35.228,99.441 ; 35.228,98.984 35.331,98.984 35.789,99.441 ; 35.228,99.441 35.228,100.001 ; 35.228,99.441 35.789,99.441 ; 35.228,100.001 35.228,103.935 ; 35.228,100.001 35.789,99.441 ; 35.228,103.935 35.228,104.137 ; 35.228,103.935 35.814,104.521 ; 35.228,104.137 35.228,104.851 ; 35.228,104.137 35.612,104.521 35.814,104.521 ; 35.228,104.851 35.228,108.991 ; 35.228,104.851 35.484,104.851 35.814,104.521 ; 35.228,108.991 35.228,109.626 ; 35.228,108.991 35.838,109.601 ; 35.228,109.626 35.228,110.288 ; 35.228,109.626 35.254,109.601 35.838,109.601 ; 35.228,110.288 35.228,114.173 ; 35.228,110.288 35.916,109.601 ; 35.228,114.173 35.228,114.63 ; 35.228,114.173 35.736,114.681 ; 35.228,114.63 35.228,115.191 ; 35.228,114.63 35.279,114.681 35.736,114.681 ; 35.228,115.191 35.738,114.681 ; 35.703,54.541 35.711,54.541 ; 35.736,114.681 35.738,114.681 ; 35.838,109.601 35.916,109.601
NetP1_2: P1.2 R9.2 | length 4.1
  Top Layer w0.254: 41.15,119.38 R9.2@43.564,119.38
  Top Layer w0.762: P1.2@39.599,119.761 39.629,119.731 40.799,119.731 41.15,119.38
NetP1_3: P1.3 P1.7 P1.11 P1.15 P1.19 P1.23 P1.27 P1.31 P2.3 P3.3 P3.7 P3.11 P3.15 P3.19 P3.23 P3.27 P3.31 | length 128.1
  Top Layer w0.762: 35.15,57.531 35.176,57.506 ; 35.152,36.068 35.152,36.358 35.176,36.382 ; 35.227,52.375 35.539,52.062 P3.15@36.733,52.062 ; 35.303,47.346 35.641,47.008 P3.19@36.707,47.008 ; P3.7@36.72,62.235 35.552,62.235 35.176,62.611 ; P3.11@36.733,57.142 35.539,57.142 35.176,57.506 ; P3.31@36.746,31.73 35.526,31.73 35.176,32.08 35.176,36.382 ; P3.27@36.751,36.805 35.598,36.805 35.176,36.382 ; P3.23@36.751,41.885 35.43,41.885 35.176,42.139 ; P3.3@36.751,67.285 35.622,67.285 ; P1.31@37.059,81.661 35.814,81.661 ; P1.27@37.059,86.741 35.735,86.741 ; P1.23@37.059,91.821 35.709,91.821 ; P1.19@37.059,96.901 35.836,96.901 ; P1.15@37.059,101.981 35.789,101.981 ; P1.11@37.059,107.061 35.763,107.061 ; P1.7@37.059,112.141 35.738,112.141 ; P1.3@37.059,117.221 37.033,117.246 35.622,117.246 35.176,116.8 35.176,112.703 ; P2.3@37.084,75.667 36.965,75.547 35.187,75.547 35.176,75.536 ; 35.176,36.382 35.176,42.139 ; 35.176,42.139 35.176,57.506 ; 35.176,57.506 35.176,62.611 ; 35.176,62.611 35.176,66.838 ; 35.176,66.838 35.622,67.285 ; 35.176,66.838 35.176,67.731 ; 35.176,67.731 35.176,75.536 ; 35.176,67.731 35.622,67.285 ; 35.176,75.536 35.176,81.026 ; 35.176,81.026 35.176,81.737 ; 35.176,81.026 35.811,81.661 ; 35.176,81.737 35.176,82.299 ; 35.176,81.737 35.252,81.661 35.811,81.661 ; 35.176,82.299 35.814,81.661 ; 35.176,82.299 35.176,86.182 ; 35.176,86.182 35.176,86.69 ; 35.176,86.182 35.735,86.741 ; 35.176,86.69 35.176,87.3 ; 35.176,86.69 35.227,86.741 35.735,86.741 ; 35.176,87.3 35.176,91.288 ; 35.176,87.3 35.735,86.741 ; 35.176,91.288 35.176,91.821 ; 35.176,91.288 35.709,91.821 ; 35.176,91.821 35.176,92.354 ; 35.176,91.821 35.709,91.821 ; 35.176,92.354 35.176,96.266 ; 35.176,92.354 35.709,91.821 ; 35.176,96.266 35.176,96.952 ; 35.176,96.266 35.811,96.901 ; 35.176,96.952 35.176,97.561 ; 35.176,96.952 35.227,96.901 35.811,96.901 ; 35.176,97.561 35.176,101.448 ; 35.176,97.561 35.836,96.901 ; 35.176,101.448 35.176,101.879 ; 35.176,101.448 35.709,101.981 ; 35.176,101.879 35.176,102.591 ; 35.176,101.879 35.277,101.981 35.709,101.981 ; 35.176,102.591 35.176,106.502 ; 35.176,102.591 35.179,102.591 35.789,101.981 ; 35.176,106.502 35.176,107.036 ; 35.176,106.502 35.735,107.061 ; 35.176,107.036 35.176,107.648 ; 35.176,107.036 35.201,107.061 35.735,107.061 ; 35.176,107.648 35.176,111.608 ; 35.176,107.648 35.763,107.061 ; 35.176,111.608 35.176,112.116 ; 35.176,111.608 35.709,112.141 ; 35.176,112.116 35.176,112.703 ; 35.176,112.116 35.201,112.141 35.709,112.141 ; 35.176,112.703 35.738,112.141 ; 35.709,101.981 35.789,101.981 ; 35.709,112.141 35.738,112.141 ; 35.735,107.061 35.763,107.061 ; 35.811,81.661 35.814,81.661 ; 35.811,96.901 35.836,96.901
NetP1_4: P1.4 R8.2 | length 4.1
  Top Layer w0.254: 41.099,117.551 R8.2@43.537,117.551 R8.2@43.564,117.551
  Top Layer w0.762: P1.4@39.599,117.221 39.604,117.226 40.774,117.226 41.073,117.526
NetP1_6: P1.6 R7.2 | length 4.1
  Top Layer w0.254: 41.226,114.275 41.251,114.3 R7.2@43.564,114.3
  Top Layer w0.762: P1.6@39.599,114.681 39.624,114.656 40.845,114.656 41.226,114.275
NetP1_8: P1.8 R6.2 | length 4.1
  Top Layer w0.254: 41.099,112.471 R6.2@43.563,112.471
  Top Layer w0.762: P1.8@39.599,112.141 39.604,112.146 40.774,112.146 41.099,112.471
NetP1_10: P1.10 R21.2 | length 4.1
  Top Layer w0.254: 41.15,109.322 41.251,109.22 R21.2@43.563,109.22
  Top Layer w0.762: P1.10@39.599,109.601 39.624,109.576 40.896,109.576 41.15,109.322
NetP1_12: P1.12 R5.2 | length 4.1
  Top Layer w0.254: 41.124,107.391 R5.2@43.563,107.391
  Top Layer w0.762: P1.12@39.599,107.061 39.606,107.053 40.786,107.053 41.124,107.391
NetP1_14: P1.14 R20.2 | length 4.1
  Top Layer w0.254: 41.073,104.165 R20.2@43.563,104.165 R20.2@43.59,104.165
  Top Layer w0.762: P1.14@39.599,104.521 39.667,104.452 40.685,104.452 41.023,104.115
NetP1_16: P1.16 R19.2 | length 4.1
  Top Layer w0.254: 41.048,102.337 R19.2@43.563,102.337 R19.2@43.59,102.337
  Top Layer w0.762: P1.16@39.599,101.981 39.642,102.024 40.736,102.024 41.048,102.337
NetP1_18: P1.18 R18.2 | length 4.1
  Top Layer w0.254: 41.124,99.06 R18.2@43.613,99.06
  Top Layer w0.762: P1.18@39.599,99.441 39.642,99.398 40.786,99.398 41.099,99.085
NetP1_20: P1.20 R17.2 | length 4.2
  Top Layer w0.254: 41.15,97.307 41.226,97.231 R17.2@43.615,97.231
  Top Layer w0.762: P1.20@39.599,96.901 39.616,96.919 40.761,96.919 41.15,97.307
NetP1_22: P1.22 R16.2 | length 4.2
  Top Layer w0.254: 41.175,93.929 41.2,93.955 R16.2@43.564,93.955
  Top Layer w0.762: P1.22@39.599,94.361 39.642,94.318 40.786,94.318 41.175,93.929
NetP1_24: P1.24 R15.2 | length 4.1
  Top Layer w0.254: 41.048,92.126 R15.2@43.539,92.126
  Top Layer w0.762: P1.24@39.599,91.821 39.616,91.839 40.761,91.839 41.048,92.126
NetP1_26: P1.26 R14.2 | length 4.2
  Top Layer w0.254: 41.15,88.849 41.2,88.9 R14.2@43.615,88.9
  Top Layer w0.762: P1.26@39.599,89.281 39.654,89.225 40.774,89.225 41.15,88.849
NetP1_28: P1.28 R10.2 | length 4.1
  Top Layer w0.254: 41.209,87.081 41.219,87.071 R10.2@43.539,87.071
  Top Layer w0.762: P1.28@39.599,86.741 39.614,86.756 40.884,86.756 41.209,87.081
NetP1_30: P1.30 R4.2 | length 4.1
  Top Layer w0.254: 41.175,83.947 R4.2@43.59,83.947
  Top Layer w0.762: P1.30@39.599,84.201 39.624,84.176 40.896,84.176 41.175,83.896
NetP1_32: P1.32 R3.2 | length 4.1
  Top Layer w0.254: 41.124,81.966 R3.2@43.59,81.966
  Top Layer w0.762: P1.32@39.599,81.661 39.619,81.641 40.799,81.641 41.124,81.966
NetP2_2: P2.2 P2.4 P2.5 R1.2 | length 10.1
  Top Layer w0.254: 41.808,78.257 R1.2@43.486,78.257 ; R1.2@42.939,78.399 R1.2@43.055,78.283 ; R1.2@43.055,78.207 R1.2@43.234,78.207
  Top Layer w0.762: P2.2@39.624,78.207 41.58,78.207
  Bottom Layer w0.762: P2.5@37.084,73.381 39.624,75.921 P2.2@39.624,78.207 P2.2@39.624,78.461
NetP2_6: P2.6 R2.2 | length 3.8
  Top Layer w0.254: 40.945,73.127 43.282,73.127 R2.2@43.383,73.228
  Top Layer w1.016: P2.6@39.624,73.127 40.945,73.127
NetP3_2: P3.2 R13.2 | length 4.2
  Top Layer w0.254: 41.326,69.367 R13.2@43.74,69.367
  Top Layer w0.762: P3.2@39.675,69.799 39.756,69.718 40.975,69.718 41.326,69.367
NetP3_4: P3.4 R24.2 | length 4.2
  Top Layer w0.254: 41.275,67.539 R24.2@43.74,67.539
  Top Layer w0.762: P3.4@39.705,67.29 P3.4@39.675,67.259 39.721,67.213 40.95,67.213 41.25,67.513
NetP3_6: P3.6 R23.2 | length 4.3
  Top Layer w0.254: 41.402,64.262 41.427,64.287 R23.2@43.74,64.287
  Top Layer w0.762: P3.6@39.675,64.719 39.751,64.643 41.021,64.643 41.402,64.262
NetP3_8: P3.8 R26.2 | length 4.3
  Top Layer w0.254: 41.275,62.459 R26.2@43.739,62.459
  Top Layer w0.762: P3.8@39.705,62.21 P3.8@39.675,62.179 39.721,62.133 40.95,62.133 41.275,62.459
NetP3_10: P3.10 R22.2 | length 4.2
  Top Layer w0.254: 41.326,59.309 41.427,59.207 R22.2@43.739,59.207
  Top Layer w0.762: P3.10@39.675,59.639 39.751,59.563 41.072,59.563 41.326,59.309
NetP3_12: P3.12 R12.2 | length 4.3
  Top Layer w0.254: 41.3,57.379 R12.2@43.739,57.379
  Top Layer w0.762: P3.12@39.693,57.117 P3.12@39.675,57.099 39.733,57.041 40.963,57.041 41.3,57.379
NetP3_14: P3.14 R30.2 | length 4.2
  Top Layer w0.254: 41.25,54.153 R30.2@43.766,54.153
  Top Layer w0.762: P3.14@39.675,54.559 39.794,54.44 40.861,54.44 41.199,54.102
NetP3_16: P3.16 R28.2 | length 4.3
  Top Layer w0.254: 41.224,52.324 R28.2@43.766,52.324
  Top Layer w0.762: P3.16@39.743,52.088 P3.16@39.675,52.019 39.682,52.012 40.912,52.012 41.224,52.324
NetP3_18: P3.18 R29.2 | length 4.3
  Top Layer w0.254: 41.3,49.047 R29.2@43.79,49.047
  Top Layer w0.762: P3.18@39.675,49.479 39.769,49.385 40.963,49.385 41.275,49.073
NetP3_20: P3.20 R27.2 | length 4.4
  Top Layer w0.254: 41.326,47.295 41.402,47.219 R27.2@43.791,47.219
  Top Layer w0.762: P3.20@39.718,46.982 P3.20@39.675,46.939 39.708,46.906 40.937,46.906 41.326,47.295
NetP3_22: P3.22 R25.2 | length 4.3
  Top Layer w0.254: 41.351,43.917 41.377,43.942 R25.2@43.74,43.942
  Top Layer w0.762: P3.22@39.675,44.399 39.769,44.305 40.963,44.305 41.351,43.917
NetP3_24: P3.24 R11.2 | length 4.2
  Top Layer w0.254: 41.224,42.113 R11.2@43.715,42.113
  Top Layer w0.762: P3.24@39.718,41.902 P3.24@39.675,41.859 39.708,41.826 40.937,41.826 41.224,42.113
NetP3_26: P3.26 R34.2 | length 4.3
  Top Layer w0.254: 41.326,38.837 41.377,38.887 R34.2@43.791,38.887
  Top Layer w0.762: P3.26@39.675,39.319 39.781,39.213 40.95,39.213 41.326,38.837
NetP3_28: P3.28 R33.2 | length 4.3
  Top Layer w0.254: 41.385,37.069 41.477,37.16 R33.2@43.763,37.16
  Top Layer w0.762: P3.28@39.693,36.797 P3.28@39.675,36.779 39.71,36.744 41.06,36.744 41.385,37.069
NetP3_30: P3.30 R32.2 | length 4.3
  Top Layer w0.254: 41.351,33.934 R32.2@43.766,33.934 ; R32.2@43.613,34.011 R32.2@43.664,33.96
  Top Layer w0.762: P3.30@39.675,34.239 39.751,34.163 41.072,34.163 41.351,33.884
NetP3_32: P3.32 R31.2 | length 4.3
  Top Layer w0.254: 41.3,31.953 R31.2@43.766,31.953 ; R31.2@43.613,32.029 R31.2@43.664,32.08
  Top Layer w0.762: P3.32@39.68,31.704 P3.32@39.675,31.699 39.746,31.628 40.975,31.628 41.3,31.953
Netp4_ID: p4.ID R77.2 | length 7.2
  Top Layer w0.381: R77.2@101.458,96.571 101.549,96.479 v1(101.549,94.818) ; v1(101.524,92.634) 101.593,92.634 101.868,92.91 p4.ID@104.602,92.91
  Bottom Layer w0.381: v1(101.524,92.634) 101.549,92.659 v1(101.549,94.818)
P\W\D\N\1: R54.2 U4.21 | length 16.7
  Top Layer w0.254: R54.2@76.454,36.906 78.461,36.906 85.505,43.951 U4.21@90.237,43.951
P\W\D\N\2: R42.2 U4.17 | length 45.2
  Top Layer w0.254: R42.2@76.947,86.817 78.156,86.817 78.562,86.411 78.562,62.027 88.087,52.502 v1(88.163,52.502) ; v1(88.062,49.124) U4.17@90.144,49.124
  Bottom Layer w0.254: v1(88.062,49.124) 88.113,49.174 88.113,52.451 v1(88.163,52.502)
P\W\D\N\10: C33.1 R53.1 R54.1 U2.35 | length 23.8
  Top Layer w0.254: U2.35@65.065,48.05 70.162,48.05 71.857,46.355 71.857,37.897 72.847,36.906 R54.1@74.554,36.906 C33.1@74.554,32.156
P\W\D\N\20: C31.1 R41.1 R42.1 U1.35 | length 22.2
  Top Layer w0.254: U1.35@65.04,97.91 68.384,97.91 73.254,93.04 73.254,87.274 73.58,86.948 74.332,86.948 R42.1@74.463,86.817 R41.1@74.463,84.48 C31.1@74.463,81.991
R\E\S\E\T\1: R56.2 U4.20 | length 15
  Top Layer w0.254: R56.2@76.434,44.455 R56.2@76.947,43.942 ; R56.2@76.454,43.942 R56.2@76.947,43.942 ; U4.20@90.237,45.221 85.531,45.221 84.252,43.942 R56.2@76.947,43.942
R\E\S\E\T\2: R44.2 U4.12 | length 51.9
  Top Layer w0.254: R44.2@76.947,93.777 77.876,93.777 79.172,92.481 79.172,62.306 84.531,56.947 92.989,56.947 93.777,56.159 U4.12@93.777,54.356
R\E\S\E\T\10: C34.1 R55.1 R56.1 U2.36 | length 17.5
  Top Layer w0.254: U2.36@65.065,48.55 70.449,48.55 72.441,46.558 72.441,45.136 73.635,43.942 R56.1@74.554,43.942 ; C34.1@74.554,39.243 R55.1@74.554,41.605 R56.1@74.554,43.942 ; R56.1@75.021,43.917 75.047,43.942 R56.1@74.554,43.942
R\E\S\E\T\20: C32.1 R43.1 R44.1 U1.36 | length 16.1
  Top Layer w0.254: U1.36@65.04,98.41 68.696,98.41 73.239,93.868 74.524,93.868 74.524,91.527 R43.1@74.463,91.465 C32.1@74.463,89.129
REF_ELC: C1.1 R2.1 U1.17 U1.18 U2.17 U2.18 | length 69.4
  Top Layer w0.254: R2.1@43.155,71.582 C1.1@45.034,71.582 ; C1.1@45.034,71.657 45.056,71.679 v1(52.019,71.679) 52.006,71.666 52.006,58.941 v1(51.994,58.928) ; v1(52.07,92.989) 54.966,92.989 55.61,93.634 U1.17@55.61,94.98 U1.18@56.11,94.98 ; v1(52.553,43.434) 52.578,43.409 55.17,43.409 55.635,43.874 U2.17@55.635,45.12 U2.18@56.135,45.12
  Bottom Layer w0.254: v1(51.994,58.928) 51.994,43.993 v1(52.553,43.434) ; v1(52.019,71.679) 52.045,71.704 52.045,92.964 v1(52.07,92.989)
RST_BR: C43.2 R64.1 U5.12 U5.14 U5.19 | length 17.1
  Top Layer w0.381: v1(94.412,80.696) 94.412,80.765 94.589,80.942 U5.19@94.589,82.543 ; v1@95.834,77.054 v1(95.834,77.114) 96.966,77.114 97.189,76.891 U5.14@97.189,75.293 97.189,72.896 C43.2@96.835,72.542 96.835,69.84 R64.1@97.182,69.493 ; U5.12@95.889,75.293 95.889,76.991 95.883,76.997 95.883,77.047 v1@95.901,77.066
  Bottom Layer w0.381: v1(94.412,80.696) 95.834,79.273 v1(95.834,77.114)
RX0: P5.1 R80.2 R81.2 | length 15.2
  Top Layer w0.381: R81.2@104.938,65.71 104.988,65.659 P5.1@107.848,65.659
  Bottom Layer w0.381: R80.2@100.609,73.528 101.783,73.528 102.133,73.177 102.133,70.206 106.68,65.659 P5.1@107.848,65.659
RX1: R80.1 U5.1 | length 17.2
  Top Layer w0.381: U5.1@88.739,75.293 v1(88.739,77.707)
  Bottom Layer w0.381: v1(88.739,77.707) 93.447,73 93.447,72.847 94.894,71.399 R80.1@100.813,71.399
RX_ESP: C99.2 R81.1 U4.34 | length 33.3
  Top Layer w0.254: C99.2@100.62,65.735 100.736,65.618 C99.2@100.736,65.402 ; v1(100.736,63.983) C99.2@100.736,65.402 ; U4.34@102.667,37.686 102.667,39.319 105.098,41.75 v1(105.105,41.75) ; R81.1@103.038,65.507 102.933,65.402 C99.2@100.736,65.402
  Bottom Layer w0.381: v1(100.736,63.983) 100.736,58.928 105.105,54.559 v1(105.105,41.75)
RXLED: D5.A U5.23 | length 3.4
  Top Layer w0.381: D5.A@90.156,84.912 90.506,84.562 91.054,84.562 91.989,83.627 U5.23@91.989,82.543
S\S\1: R59.2 U4.19 | length 15.9
  Top Layer w0.254: R59.2@76.454,50.8 81.94,50.8 86.233,46.507 U4.19@90.576,46.507
S\S\2: R46.2 U4.10 | length 58.9
  Top Layer w0.254: R46.2@76.947,100.66 77.318,100.66 81.077,96.901 81.077,63.373 86.233,58.217 94.463,58.217 96.241,56.439 U4.10@96.241,54.788
S\S\10: R59.1 U2.39 | length 10.2
  Top Layer w0.254: U2.39@65.065,50.05 70.98,50.05 71.857,50.927 R59.1@74.92,50.927
S\S\20: R46.1 U1.39 | length 9.8
  Top Layer w0.254: U1.39@65.04,99.91 72.3,99.91 73.101,100.711 R46.1@74.463,100.711
SCLK: R47.2 R60.2 U4.13 | length 76.8
  Top Layer w0.254: R47.2@76.363,102.946 77.267,102.946 81.763,98.45 81.763,63.576 86.385,58.953 92.456,58.953 v1(92.481,58.979) ; R60.2@76.454,53.086 76.835,53.467 v1(83.82,53.467) ; U4.13@92.507,54.356 92.532,54.381 v1(92.532,56.21)
  Bottom Layer w0.254: v1(83.82,53.467) 89.789,53.467 v1(92.532,56.21) 92.507,56.236 92.507,58.953 v1(92.481,58.979)
SCLK1: R60.1 U2.40 | length 11
  Top Layer w0.254: U2.40@65.065,50.55 70.108,50.55 72.644,53.086 R60.1@75.047,53.086
SCLK2: R47.1 U1.40 | length 10.9
  Top Layer w0.254: U1.40@65.04,100.41 70.819,100.41 73.228,102.819 R47.1@74.92,102.819
START: R45.2 R58.2 U4.11 | length 73.3
  Top Layer w0.254: R45.2@76.363,98.374 76.468,98.269 77.245,98.269 80.442,95.072 80.442,63.094 84.62,58.915 84.62,58.229 85.268,57.582 93.955,57.582 95.047,56.49 U4.11@95.047,55.067 ; R58.2@76.86,48.92 R58.2@76.454,48.514 76.479,48.539 v1(81.331,48.539)
  Bottom Layer w0.254: v1(81.331,48.539) 81.331,55.22 84.255,58.144 84.56,58.144 v1(84.633,58.217)
START1: R58.1 U2.38 | length 10.4
  Top Layer w0.254: U2.38@65.065,49.55 71.024,49.55 72.06,48.514 R58.1@75.047,48.514
START2: R45.1 U1.38 | length 9.8
  Top Layer w0.254: U1.38@65.04,99.41 72.192,99.41 73.203,98.4 R45.1@74.463,98.4
TX0: P5.2 R79.2 R82.2 | length 10
  Top Layer w0.381: R82.2@104.988,68.199 P5.2@107.848,68.199
  Bottom Layer w0.381: R79.2@103.683,71.643 107.071,71.643 107.848,70.866 P5.2@107.848,68.199
TX1: R79.1 U5.5 | length 17.2
  Top Layer w0.381: U5.5@91.339,75.293 91.339,77.42 91.999,78.08 v1(97.13,78.08)
  Bottom Layer w0.381: v1(97.13,78.08) 97.178,78.031 97.358,78.031 97.36,78.029 100.127,78.029 103.614,74.542 103.614,73.612 R79.1@103.683,73.543
TX_ESP: C100.2 R82.1 U4.35 | length 45.3
  Top Layer w0.254: C100.2@96.164,65.644 C100.2@96.378,65.43 ; C100.2@96.164,65.72 96.164,66.65 97.231,67.716 102.606,67.716 R82.1@103.088,68.199 ; C100.2@96.378,65.684 C100.2@96.378,65.43 ; v1(97.46,64.033) 96.749,64.033 96.378,64.404 96.378,65.303 C100.2@96.378,65.43 ; v1(103.962,35.052) 103.988,35.077 U4.35@103.988,37.305
  Bottom Layer w0.381: v1(97.46,64.033) 97.46,60.223 103.962,53.721 v1(103.962,35.052)
TXLED: D6.A U5.22@92.639,82.543 | length 6.2
  Top Layer w0.381: D6.A@90.105,87.3 90.252,87.152 91.003,87.152 91.643,86.512 91.643,85.014 92.639,84.018 U5.22@92.639,82.543
VCAP1: C20.1 C21.1 U2.28 | length 13.4
  Top Layer w0.254: U2.28@61.135,45.12 61.135,43.36 61.849,42.647 64.719,42.647 65.837,41.529 65.837,38.44 C21.1@65.566,38.168 65.617,38.118 C21.1@65.561,38.118 ; C21.1@65.303,38.1 65.303,38.456 C21.1@65.634,38.786 ; C20.1@65.77,36.249 C21.1@65.77,38.041
VCAP1_: C22.1 C23.1 U1.28 | length 13.2
  Top Layer w0.254: U1.28@61.11,94.98 61.11,93.856 62.205,92.761 64.592,92.761 65.913,91.44 65.913,88.431 C23.1@65.595,88.113 65.595,85.369 C22.1@65.57,85.344
VCAP2: C27.1 U2.30 | length 9.1
  Top Layer w0.254: U2.30@62.135,45.12 62.135,43.58 62.535,43.18 65.227,43.18 66.015,42.393 66.836,42.393 67.782,42.393 C27.1@67.818,42.357 ; C27.1@66.836,42.435 C27.1@67.782,42.435 ; C27.1@67.427,42.41 67.765,42.41 C27.1@67.842,42.333
VCAP2_: C25.1 U1.30 | length 8.2
  Top Layer w0.254: U1.30@62.11,94.98 62.11,93.846 62.662,93.294 64.897,93.294 66.277,91.914 67.556,91.914 C25.1@67.668,91.802 ; C25.1@66.91,91.147 C25.1@67.259,91.496 ; C25.1@67.097,91.12 C25.1@67.234,91.257
VCAP3: C17.1 C18.1 U2.55 | length 8.5
  Top Layer w0.254: U2.55@60.135,56.48 60.135,58.738 61.366,59.969 61.366,60.65 C17.1@61.778,61.062 ; C17.1@61.821,61.005 61.821,63.33 C18.1@61.778,63.373 61.778,63.473 C18.1@62.292,63.988
VCAP3_: C15.1 C16.1 U1.55 | length 8.3
  Top Layer w0.254: U1.55@60.11,106.34 60.11,110.503 60.779,111.172 61.607,111.172 C15.1@61.661,111.227 C16.1@61.661,113.538
VCAP4: C19.1 U2.26 | length 7.5
  Top Layer w0.254: U2.26@60.135,45.12 60.135,43.37 61.443,42.062 63.805,42.062 64.22,41.648 64.22,41.257 C19.1@64.59,40.886
VCAP4_: C24.1 U1.26 | length 7.6
  Top Layer w0.254: U1.26@60.11,94.98 60.11,94.017 61.874,92.253 64.186,92.253 64.628,91.811 C24.1@64.628,90.653
VREFP: C9.1 C14.1 U2.24 | length 8.3
  Top Layer w0.254: U2.24@59.135,45.12 59.135,41.539 59.137,41.537 59.137,41.29 C14.1@59.66,40.767 ; C14.1@59.609,40.716 59.763,40.562 59.789,40.536 C14.1@59.789,40.271 ; C14.1@59.818,40.616 59.63,40.429 C14.1@59.789,40.271 ; C14.1@59.849,40.211 C14.1@59.789,40.271 ; C9.1@60.005,38.151 C9.1@60.056,38.1 ; C14.1@60.147,40.742 60.147,38.671 C9.1@60.515,38.303
VREFP_: C10.1 C13.1 U1.24 | length 7.5
  Top Layer w0.254: U1.24@59.11,94.98 59.11,91.218 C13.1@59.675,90.653 ; C13.1@59.599,90.653 60.071,90.18 60.071,88.607 C10.1@60.566,88.113
pads on no net: p4.0 p4.6 U1.27 U1.29 U1.31 U1.60 U1.64 U2.27 U2.29 U2.60 U2.64 U4.4 U4.5 U4.6 U4.8 U4.9 U4.22 U4.23 U4.24 U4.26 U4.27 U4.28 U4.29 U4.31 U4.32 U4.33 U4.37 U5.2 U5.3 U5.6 U5.8 U5.10 U5.11 U5.13 U5.22@93.939,75.293 U5.24 U5.27 U5.28

## Polygon pours and split planes (outlines as drawn)
GND on Top Layer "GND_L01_P012" (solid, remove dead copper, pour order 12): 63.235,119.352 63.235,55.525 61.778,55.525 61.755,54.415 62.52,53.633 63.235,53.633 63.235,30.856 65.352,28.739 107.744,28.739 109.497,30.492 109.497,119.929 107.735,121.683 65.344,121.471
GND on Top Layer "GND_L01_P016" (solid, remove dead copper, pour order 16): 62.832,119.906 62.832,107.231 60.96,107.231 60.96,103.734 61.798,102.895 62.841,102.895 62.866,57.371 61.544,57.371 61.544,54.127 62.382,53.289 62.916,53.289 62.91,30.474 61.283,28.847 35.426,28.847 34.841,29.431 34.841,121.049 35.301,121.509 61.205,121.532
GND on Top Layer "GND_L01_P015" (solid, pour order 15): 63.994,105.316 61.278,105.316 61.239,105.277 61.239,103.866 61.949,103.157 63.994,103.157
3.3V on Top Layer "3.3V_L01_P017" (solid, pour order 17): 91.008,100.482 91.008,106.985 84.557,106.985 84.557,100.508
GND on Bottom Layer "GND_L02_P013" (solid, pour order 13): 63.286,119.25 63.286,55.424 61.829,55.424 61.806,54.313 62.571,53.532 63.286,53.532 63.286,30.754 65.403,28.638 107.795,28.638 109.548,30.39 109.548,119.827 107.786,121.581 65.395,121.37
GND on Bottom Layer "GND_L02_P014" (solid, pour order 14): 62.89,119.305 62.89,107.112 60.96,107.112 60.96,103.734 61.798,102.895 62.89,102.895 62.915,57.252 61.57,57.252 61.57,54.127 62.408,53.289 62.89,53.289 62.884,30.753 60.858,28.727 35.001,28.727 34.417,29.312 34.417,120.929 34.877,121.39 60.781,121.413
GND on Bottom Layer "GND_L02_P011" (solid, pour order 11): 64,105.293 61.284,105.293 61.245,105.254 61.245,103.843 61.955,103.134 64,103.134

## Keep-outs
Keep-Out Layer:
  the board outline again, w0.254

## Other copper
Top Layer:
  pour cut-out: 63.271,105.247 63.271,108.264 63.779,108.264 63.779,105.715 cw(c63.314,105.715) 63.314,105.249 63.274,105.249
  pour cut-out: 63.271,55.446 63.271,57.549 63.779,57.549 63.779,55.753 cw(c63.475,55.753) 63.475,55.448 63.274,55.448
  pour cut-out: 77.059,111.555 77.059,113.083 77.057,113.081 75.626,113.081 75.626,111.557
  pour cut-out: 65.785,101.305 65.785,100.787 66.472,100.787 66.497,100.813 66.005,101.305
  pour cut-out: 66.159,47.145 66.084,47.22 63.987,47.22 63.994,46.737 66.206,46.737 66.23,47.039
  pour cut-out: 66.659,96.622 64.313,96.622 64.086,96.622 64.086,97.033 66.247,97.033